# EAGLE board PCB_v28 (EAGLE 9.7.0)
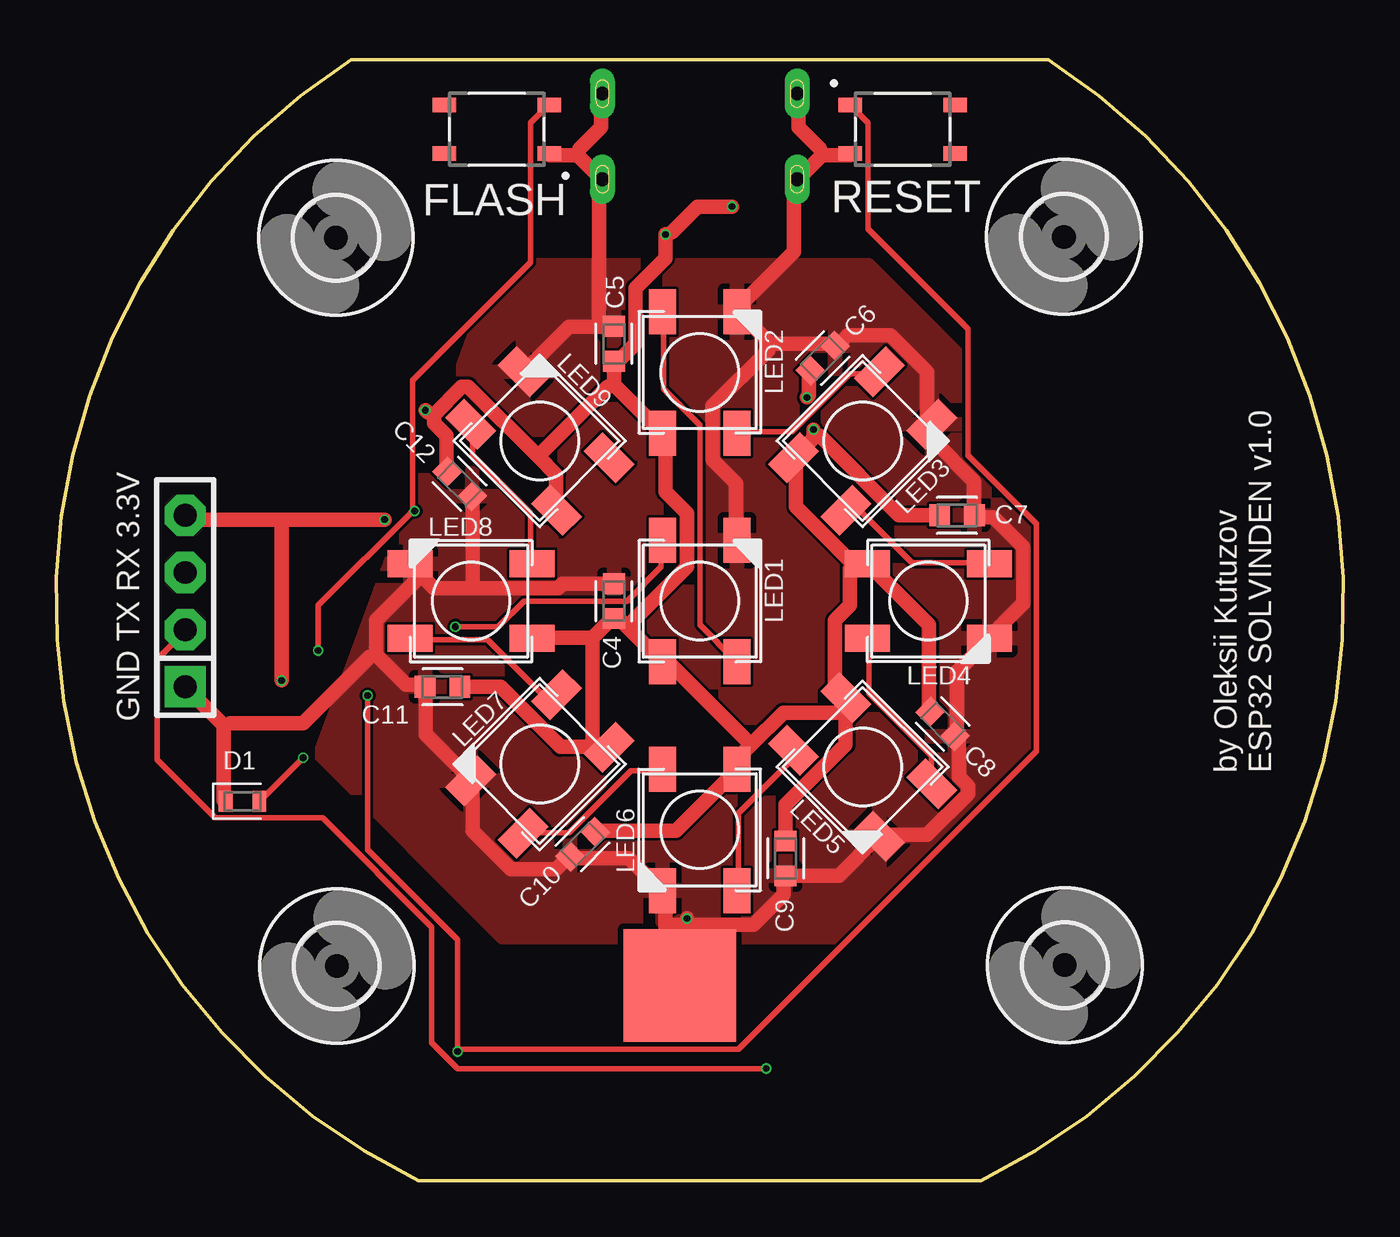
[diagram p0: board, top side]
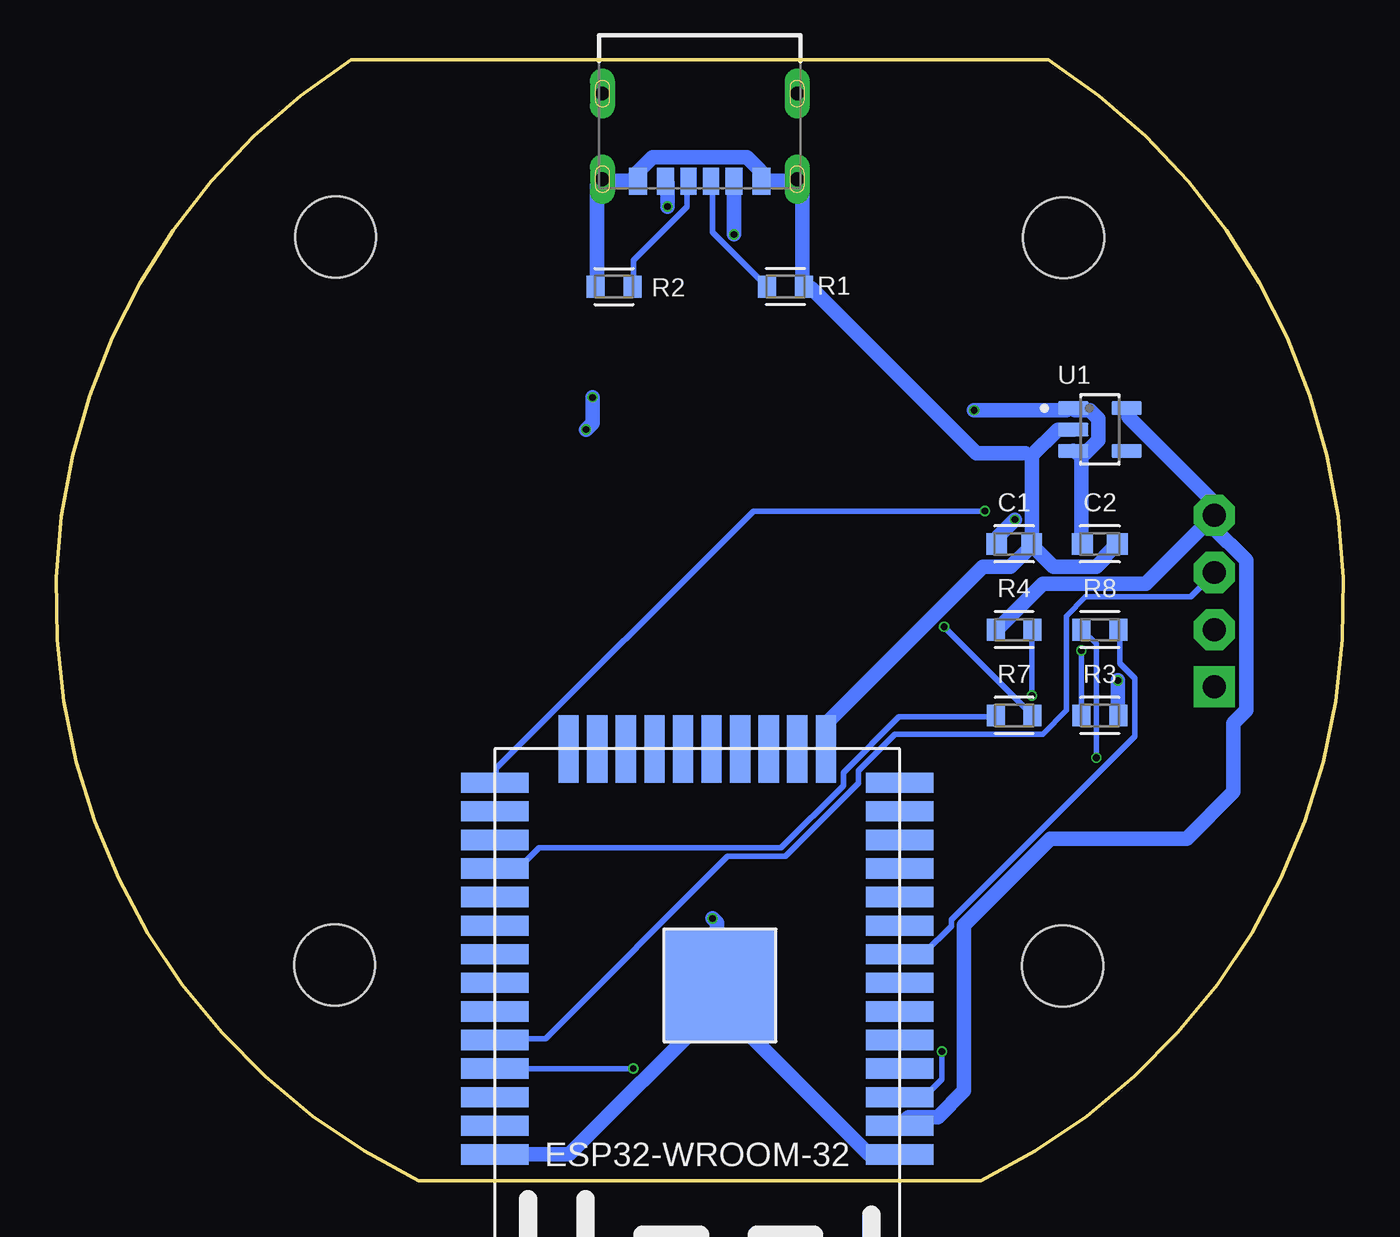
[diagram p1: board, bottom side, seen from below]

Size 57.19 x 49.79 mm. Coordinates in mm from the lower left corner, seen from the top.
Outline: 13.09,49.79 arc121 16.09,0 41.09,0 arc121 44.09,49.79 13.09,49.79
Copper layers (1*16): Top 0.035mm / dielectric 1.6mm / Bottom 0.035mm
Design rules "jlcpcb-2layers": minimum track width 5mil, minimum drill 0.3mm, track to track 5mil, track to pad 5mil, pad to pad 5mil, via to via 5mil, smd to smd 5mil, copper to edge 0.2mm, drill to drill 6mil, minimum pad ring 10mil, minimum via ring 3mil, stop-mask expansion 4mil, vias tented up to drill 0mil, thermal gap 10mil
Net classes: 0 default: width 0.254 mm; 1 5V: width 0.635 mm; 2 GND: width 0.635 mm

## Footprints (pad centres in the part's own frame; a part is rotated, then mirrored left to right if it is on the bottom)
CAPC1608X85 = smd 0.921 x 0.97: 1 -0.775,0; 2 0.775,0
LEDC1608X80N_FLAT-R = smd 0.612 x 0.912: A 0.75,0; C -0.75,0
3,6 = hole 3.6: 0,0
GCT_USB4125-GF-A_REVA = smd 0.7 x 1.2: A5 -0.5,0.08; B5 0.5,0.08 | smd 0.76 x 1.2: A9 1.52,0.08; B9 -1.52,0.08 | smd 0.8 x 1.2: A12 2.75,0.08; B12 -2.75,0.08 | drill 0.6 pad 1.1 long: S1 -4.32,0; S2 4.32,0; S3 -4.32,-3.8; S4 4.32,-3.8
SIP-100-04-40 = drill 1.016 pad 1.778 square: 1 -3.81,0 | drill 1.016 pad 1.778 octagon: 2 -1.27,0; 3 1.27,0; 4 3.81,0
LED5050_W = smd 2 x 1.2: 1-VDD 2.7,-1.65; 2-DOUT 2.7,1.65; 3-GND -2.7,1.65; 4-DIN -2.7,-1.65
RESC1608X60 = smd 0.799 x 0.974: 1 -0.815,0; 2 0.815,0
SW_SKRPACE010 = smd 1.05 x 0.65: 1 -2.329,1.075; 2 2.329,1.075; 3 -2.329,-1.075; 4 2.329,-1.075
SOT95P285X140-5N = smd 1.35 x 0.6: 1 -1.185,0.95; 2 -1.185,0; 3 -1.185,-0.95; 4 1.185,-0.95; 5 1.185,0.95
ESP32-WROOM = smd 3 x 0.9: 3V3 0,16.74; EN 0,15.47; GND1 0,18.01; GND3 18,18.01; IO0 18,1.5; IO4 18,2.77; IO5 18,6.58; IO12 0,1.5; IO14 0,2.77; IO16 18,4.04; IO17 18,5.31; IO18 18,7.85; IO19 18,9.12; IO21 18,11.66; IO22 18,15.47; IO23 18,16.74; IO25 0,6.58; IO26 0,5.31; IO27 0,4.04; IO32 0,9.12; IO33 0,7.85; IO34 0,11.66; IO35 0,10.39; NC 18,10.39; RX 18,12.93; SENSOR_VN 0,12.93; SENSOR_VP 0,14.2; TX 18,14.2 | smd 0.9 x 3: CLK 9.635,0; CMD 8.365,0; GND2 3.285,0; IO2 14.715,0; IO13 4.555,0; IO15 13.445,0; SD0 10.905,0; SD1 12.175,0; SD2 5.825,0; SD3 7.095,0 | smd 5 x 5: GND4 8,10.5 | smd 5 x 5 bottom: GND5 8,10.5

## Placement (x,y rotation side)
C1  10uF  [CAPC1608X85]  14.62,28.28 0 bottom
C2  10uF  [CAPC1608X85]  10.81,28.28 0 bottom
C4  0.1uF  [CAPC1608X85]  24.78,25.74 270 top
C5  0.1uF  [CAPC1608X85]  24.78,37.17 270 top
C6  0.1uF  [CAPC1608X85]  34.05,36.53 225 top
C7  0.1uF  [CAPC1608X85]  40.02,29.55 0 top
C8  0.1uF  [CAPC1608X85]  39.39,20.28 135 top
C9  0.1uF  [CAPC1608X85]  32.4,14.31 90 top
C10  0.1uF  [CAPC1608X85]  23.39,14.94 225 top
C11  0.1uF  [CAPC1608X85]  17.16,21.93 0 top
C12  0.1uF  [CAPC1608X85]  17.93,30.94 135 top
D1  LED  [LEDC1608X80N_FLAT-R]  8.27,16.85 0 top
H3  MOUNT-HOLE3.6  [3,6]  44.78,41.92 0 top
H5  MOUNT-HOLE3.6  [3,6]  44.81,9.57 0 top
H7  MOUNT-HOLE3.6  [3,6]  12.47,9.53 0 top
H9  MOUNT-HOLE3.6  [3,6]  12.43,41.88 0 top
J1  USB4125-GF-A_REVA  [GCT_USB4125-GF-A_REVA]  28.59,44.48 180 bottom
J2  F-1X04-SIP-100-40  [SIP-100-04-40]  5.73,25.74 90 top
LED1  [LED5050_W]  28.59,25.74 270 top
LED2  [LED5050_W]  28.59,35.9 270 top
LED3  [LED5050_W]  35.83,32.85 225 top
LED4  [LED5050_W]  38.75,25.74 180 top
LED5  [LED5050_W]  35.83,18.37 135 top
LED6  [LED5050_W]  28.59,15.58 90 top
LED7  [LED5050_W]  21.48,18.5 45 top
LED8  [LED5050_W]  18.43,25.74 0 top
LED9  [LED5050_W]  21.48,32.85 315 top
R1  5.1k  [RESC1608X60]  24.78,39.71 0 bottom
R2  5.1k  [RESC1608X60]  32.4,39.71 180 bottom
R3  4.7K  [RESC1608X60]  10.81,20.66 0 bottom
R4  4.7K  [RESC1608X60]  14.62,24.47 0 bottom
R7  300-500 ohm  [RESC1608X60]  14.62,20.66 0 bottom
R8  430  [RESC1608X60]  10.81,24.47 0 bottom
S1  SKRPACE010  [SW_SKRPACE010]  19.58,46.69 180 top
S2  SKRPACE010  [SW_SKRPACE010]  37.61,46.69 0 top
U1  AP2112K-3.3TRG1  [SOT95P285X140-5N]  10.81,33.36 0 bottom
U2  ESP32-WROOM  [ESP32-WROOM]  19.7,19.17 180 bottom

## Library data of the parts
C1 C2 C4-C12 = Capacitor; CATEGORY: Capacitor
D1 = LED; CATEGORY: LED; COLOR: RED; DESCRIPTION: CHIP LED FLAT; SUB-CATEGORY: CHIP; TYPE: FLAT_TOP
H3 H5 H7 H9 = holes
J1 = USB4125-GF-A_REVA model; AVAILABILITY: Warning; DESCRIPTION: USB Charge Only Connector Type C Horizontal Receptacle, 3.16mm profile, 6 Pins, Surface mount, Top mount, low cost; MF: Global Connector Technology; MP: USB4125-GF-A; PACKAGE: None; PRICE: None; PURCHASE-URL: https://pricing.snapeda.com/search/part/USB4125-GF-A/?ref=eda
J2 = con-headers-jp
LED1-LED9 = SK6812
R1-R4 R7 R8 = Resistor; CATEGORY: Resistor; SUB-CATEGORY: Fixed
S1 S2 = SKRPACE010; MANUFACTURER: ALPS; STANDARD: Maniufacturer Recommendations
U1 = AP2112K-3.3TRG1; MANUFACTURER: Diodes Inc.; PARTREV: 2-2
U2 = ESP32

## Nets
1-2: LED1.2-DOUT LED2.4-DIN
2-3: LED2.2-DOUT LED3.4-DIN
3-4: LED3.2-DOUT LED4.4-DIN
4-5: LED4.2-DOUT LED5.4-DIN
5-6: LED5.2-DOUT LED6.4-DIN
6-7: LED6.2-DOUT LED7.4-DIN
7-8: LED7.2-DOUT LED8.4-DIN
8-9: LED8.2-DOUT LED9.4-DIN
+3.3V [5V]: C1.1 J2.4 R3.2 R4.1 U1.5 U2.3V3
+5V [5V]: C2.1 C4.2 C5.2 C6.2 C7.1 C8.2 C9.2 C10.1 C11.2 C12.2 J1.A9 J1.B9 LED1.1-VDD LED2.1-VDD LED3.1-VDD LED4.1-VDD LED5.1-VDD LED6.1-VDD LED7.1-VDD LED8.1-VDD LED9.1-VDD U1.1 U1.3
CC1: J1.A5 R1.1
CC2: J1.B5 R2.1
DATA: LED1.4-DIN R7.2
EN: R4.2 S2.1 U2.EN
ESP_RX: J2.3 U2.RX
ESP_TX: J2.2 U2.TX
GND [GND]: C1.2 C2.2 C4.1 C5.1 C6.1 C7.2 C8.1 C9.1 C10.2 C11.1 C12.1 D1.C J1.A12 J1.B12 J1.S1 J1.S2 J1.S3 J1.S4 J2.1 LED1.3-GND LED2.3-GND LED3.3-GND LED4.3-GND LED5.3-GND LED6.3-GND LED7.3-GND LED8.3-GND LED9.3-GND R1.2 R2.2 S1.1 S2.3 U1.2 U2.GND1 U2.GND2 U2.GND3 U2.GND4 U2.GND5
GPIO0: R3.1 S1.3 U2.IO0
GPIO17: R7.1 U2.IO17
GPIO32: R8.2 U2.IO32
LED: D1.A R8.1

## Tracks (layer width: path | path; a pad name or v marks a point on that pad's centre or on a via)
1-2
  Top 0.254: LED2.4-DIN 26.97,38.6 26.97,35.17 28.59,33.55 28.59,24.69 30.21,23.07 LED1.2-DOUT
2-3
  Top 0.254: LED2.2-DOUT 30.31,33.26 32.69,33.26 35.26,35.83 36.5,35.83 LED3.4-DIN
3-4
  Top 0.254: LED4.4-DIN 41.45,27.45 38.02,27.45 35.74,29.74 35.17,29.74 LED3.2-DOUT
4-5
  Top 0.254: LED4.2-DOUT 36.12,24.02 36.12,21.64 38.88,18.88 38.88,17.64 LED5.4-DIN
5-6
  Top 0.254: LED6.4-DIN 30.31,12.88 30.31,16.31 32.69,18.69 32.69,19.07 LED5.2-DOUT
6-7
  Top 0.254: LED7.4-DIN 20.78,15.45 22.78,15.45 25.55,18.21 26.88,18.21 LED6.2-DOUT
7-8
  Top 0.254: LED8.4-DIN 15.73,24.02 19.16,24.02 21.55,21.64 22.21,21.64 LED7.2-DOUT
8-9
  Top 0.254: LED8.2-DOUT 21.07,27.45 21.07,29.64 18.5,32.21 18.5,33.55 LED9.4-DIN
+3.3V  (via drill 0.3)
  Top 0.635: 10.02,29.36 5.92,29.36 J2.4 | 10.02,29.36 v14.59,29.36 | 10.02,29.36 v10.02,22.21
  Bottom 0.635: v14.59,29.36 15.35,28.59 15.35,28.31 C1.1 | v10.02,22.21 10.02,20.69 R3.2 | J2.4 8.78,26.5 13.35,26.5 15.35,24.5 R4.1 | U1.5 9.54,34.21 9.54,33.93 5.83,30.21 5.83,29.83 J2.4 | J2.4 5.83,29.07 4.3,27.55 4.3,20.88 4.88,20.31 4.88,17.26 6.95,15.18 13.01,15.18 16.85,11.35 16.85,3.98 18.02,2.81 19.33,2.81 U2.3V3
+5V  (via drill 0.3)
  Top 0.635: 24.78,35.36 C5.2 25.07,36.5 25.74,37.17 25.74,39.64 27.07,40.98 v27.07,42.03 27.36,42.12 28.5,43.26 v30.02,43.26 | 24.78,35.36 26.88,33.26 LED2.1-VDD 27.07,32.88 27.07,30.6 28.02,29.64 28.02,27.26 25.35,24.59 | 16.78,34.02 16.78,33.64 17.35,33.07 17.35,31.55 C12.2 | 16.78,34.02 18.02,35.26 18.31,35.26 21.4,32.17 | 21.4,32.17 22.21,31.36 22.21,29.83 LED9.1-VDD | v16.4,34.21 16.5,34.12 16.78,34.02 | 21.4,32.17 24.5,35.26 24.78,35.36 | C8.2 38.79,20.88 38.79,24.69 36.12,27.36 LED4.1-VDD | v33.36,34.79 33.45,34.88 33.45,35.93 C6.2 | 33.64,33.07 33.64,32.98 32.78,32.12 LED3.1-VDD 32.88,31.83 32.88,29.93 35.36,27.45 35.74,27.45 LED4.1-VDD | 33.64,33.07 v33.64,33.36 | C7.1 37.45,29.55 33.93,33.07 33.64,33.07 | 25.35,24.59 26.88,23.07 LED1.1-VDD 27.26,22.98 30.88,19.36 | 25.35,24.59 25.07,24.88 24.78,24.88 C4.2 24.5,24.78 23.83,24.12 | 23.83,24.12 21.16,24.12 LED8.1-VDD | C11.2 19.74,21.93 22.4,19.26 23.83,19.26 | 23.83,19.26 24.5,19.26 LED7.1-VDD | 23.83,19.26 23.83,24.12 | C9.2 32.4,16.69 35.07,19.36 35.07,20.78 | 35.07,20.78 35.07,21.36 LED5.1-VDD 34.98,21.74 34.59,22.12 34.59,24.88 35.26,25.55 35.26,27.17 LED4.1-VDD | C10.1 24.02,15.55 27.55,15.55 30.21,18.21 LED6.1-VDD 30.31,18.59 30.31,18.78 30.88,19.36 | 35.07,20.78 32.31,20.78 30.88,19.36
  Bottom 0.635: v27.07,42.03 27.07,44.31 J1.B9 | v30.02,43.26 30.02,44.31 J1.A9 | C2.1 11.64,28.31 11.64,32.12 11.92,32.41 U1.3 11.45,32.31 10.88,32.88 10.88,33.83 11.26,34.21 11.92,34.21 U1.1 12.31,34.21 v16.4,34.21 | v33.36,34.79 33.36,33.64 v33.64,33.36
CC1
  Bottom 0.254: R1.1 25.64,39.74 28.02,42.12 28.02,44.31 J1.A5
CC2
  Bottom 0.254: R2.1 31.55,39.74 31.55,40.88 29.17,43.26 29.17,44.31 J1.B5
DATA  (via drill 0.3)
  Top 0.254: v17.74,24.59 19.64,24.59 20.78,25.74 25.35,25.74 26.88,27.26 26.88,28.4 LED1.4-DIN
  Bottom 0.254: v17.74,24.59 13.83,20.69 R7.2
EN  (via drill 0.3)
  Top 0.254: v13.83,21.55 13.83,14.69 17.83,10.69 v17.83,5.73 17.93,5.83 30.31,5.83 43.55,19.07 43.55,29.17 40.5,32.21 40.5,37.83 36.06,42.27 36.06,46.99 S2.1
  Bottom 0.254: v13.83,21.55 13.83,24.4 R4.2 | v17.83,5.73 17.83,4.5 18.59,3.73 19.64,3.73 U2.EN
ESP_RX
  Bottom 0.254: U2.RX 37.64,6.31 35.45,6.31 27.36,14.4 24.78,14.4 21.55,17.64 21.55,18.21 19.93,19.83 13.35,19.83 12.31,20.88 12.31,25.07 11.45,25.93 6.78,25.93 5.73,26.98 J2.3
ESP_TX  (via drill 0.3)
  Top 0.254: v31.55,4.97 17.83,4.97 16.69,6.12 16.69,11.26 11.83,16.12 7.07,16.12 4.5,18.69 4.5,23.17 5.73,24.4 J2.2
  Bottom 0.254: v31.55,4.97 37.64,4.97 U2.TX
GND  (via drill 0.3)
  Top 0.635: 24.12,37.93 22.78,37.93 20.78,35.93 LED9.3-GND | 24.12,37.93 C5.1 | 23.16,45.55 21.93,45.55 S1.1 | 23.16,45.55 24.21,44.5 J1.S1 24.12,44.22 24.12,37.93 | J1.S3 24.21,48.22 24.21,46.79 23.26,45.84 23.16,45.55 | 34.02,45.55 35.26,45.55 S2.3 | 34.02,45.55 32.97,44.5 J1.S2 32.78,44.22 32.78,41.26 30.4,38.88 LED2.3-GND 30.31,38.6 31.74,37.17 | J1.S4 32.97,48.22 32.97,46.79 33.93,45.84 34.02,45.55 | 31.74,37.17 34.59,37.17 C6.1 34.88,37.26 35.17,37.55 37.07,37.55 38.69,35.93 38.69,33.83 LED3.3-GND 38.98,33.55 38.98,32.88 40.79,31.07 C7.2 41.07,29.45 41.64,29.45 42.98,28.12 42.98,25.64 41.64,24.31 LED4.3-GND 41.45,24.02 40.02,22.59 40.02,19.74 C8.1 40.12,19.45 40.12,17.93 40.5,17.55 40.5,17.17 38.69,15.36 36.88,15.36 LED5.3-GND 36.5,15.26 34.78,13.55 C9.1 32.31,13.26 32.31,12.69 30.97,11.35 28.02,11.35 | LED1.3-GND 30.21,28.5 30.21,30.98 29.17,32.02 29.17,34.41 31.64,36.88 31.74,37.17 | 7.45,20.21 7.45,16.88 D1.C | J2.1 7.45,20.21 | 18.5,26.31 16.78,26.31 16.21,26.88 | 18.5,26.31 22.31,26.31 22.5,26.5 C4.1 | 16.21,26.88 15.73,27.36 LED8.3-GND | 18.5,26.31 18.5,30.31 C12.1 | 14.21,23.36 15.54,22.02 16.12,22.02 C11.1 16.4,19.83 18.4,17.83 LED7.3-GND 18.5,17.45 18.5,15.55 20.21,13.83 22.21,13.83 22.59,14.21 C10.2 22.88,14.31 25.45,14.31 26.88,12.88 LED6.3-GND 27.07,12.59 27.07,11.35 | 14.21,23.36 14.21,24.88 16.21,26.88 | 7.45,20.21 7.73,20.31 10.97,20.31 13.93,23.26 14.21,23.36 | 27.07,11.35 27.07,9.26 27.64,8.69 U2.GND5 | 28.02,11.35 27.07,11.35 | v28.02,11.64 28.02,11.35
  Bottom 0.635: C2.2 10.11,28.21 10.59,27.74 10.59,27.64 10.97,27.26 12.88,27.26 13.83,28.21 C1.2 | U1.2 12.69,33.36 13.83,32.21 | 13.83,32.21 13.83,28.59 C1.2 | U2.GND2 22.97,19.26 22.97,20.31 16.02,27.26 14.78,27.26 14.02,28.02 C1.2 | R2.2 33.17,39.74 33.17,44.22 32.97,44.41 J1.S2 32.59,44.41 31.36,44.41 J1.A12 31.45,44.69 30.69,45.45 26.5,45.45 25.93,44.88 25.93,44.69 J1.B12 25.83,44.41 24.59,44.41 J1.S1 24.21,44.41 24.02,44.22 24.02,39.74 R1.2 23.64,39.64 16.31,32.31 14.12,32.31 13.83,32.21 | U2.GND1 19.74,1.16 21.07,1.16 27.64,7.74 27.64,8.59 U2.GND5 | U2.GND3 37.64,1.16 34.4,1.16 27.93,7.64 U2.GND5 | v28.02,11.64 27.83,11.45 27.83,8.97 U2.GND5
  pour Top: 19.84,10.81 37.35,10.81 44.79,18.25 44.79,31.96 36.08,40.66 19.72,40.66 11.72,18.93
GPIO0  (via drill 0.3)
  Top 0.254: v11.64,23.55 11.64,25.55 15.83,29.74 | 15.83,29.74 15.83,35.55 21.07,40.79 21.07,46.98 21.83,47.74 S1.3 | v15.93,29.74 15.83,29.74
  Bottom 0.254: v11.64,23.55 11.64,20.69 R3.1 | v15.93,29.74 26.21,29.74 37.64,18.31 37.64,17.74 U2.IO0
GPIO17
  Bottom 0.254: R7.1 15.45,20.59 19.74,20.59 22.21,18.12 22.21,17.55 24.97,14.78 35.74,14.78 36.59,13.93 37.64,13.93 U2.IO17
GPIO32
  Bottom 0.254: R8.2 9.92,24.4 9.92,22.98 9.26,22.31 9.26,19.74 17.42,11.58 17.42,11.3 18.6,10.12 19.64,10.12 U2.IO32
LED  (via drill 0.3)
  Top 0.254: v10.97,18.78 9.07,16.88 D1.A
  Bottom 0.254: v10.97,18.78 10.97,23.83 11.54,24.4 R8.1

## Text on the board
tNames: FLASH | RESET | GND TX RX 3.3V | by Oleksii Kutuzov / ESP32 SOLVINDEN v1.0